# EAGLE board LB_BIT_iX_1IN_1OUT-XLWIDE-v03(1_1x) (EAGLE 6.5.0)
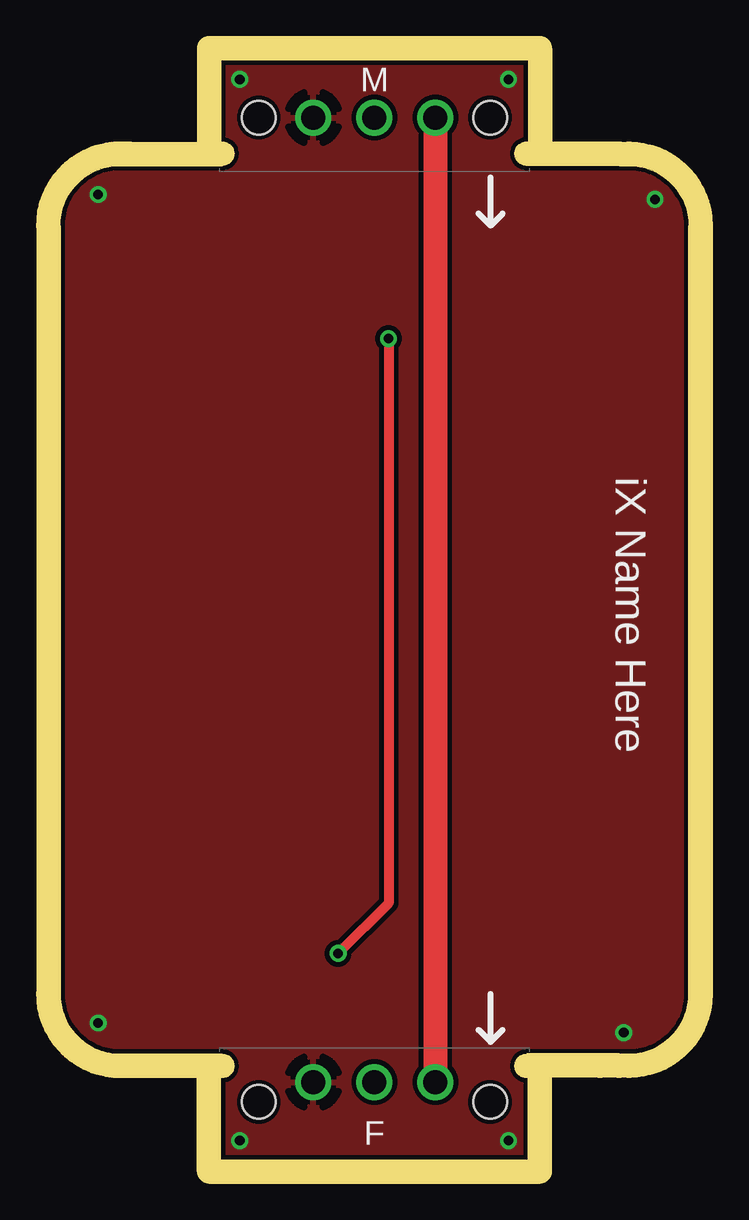
[diagram p0: board, top side]
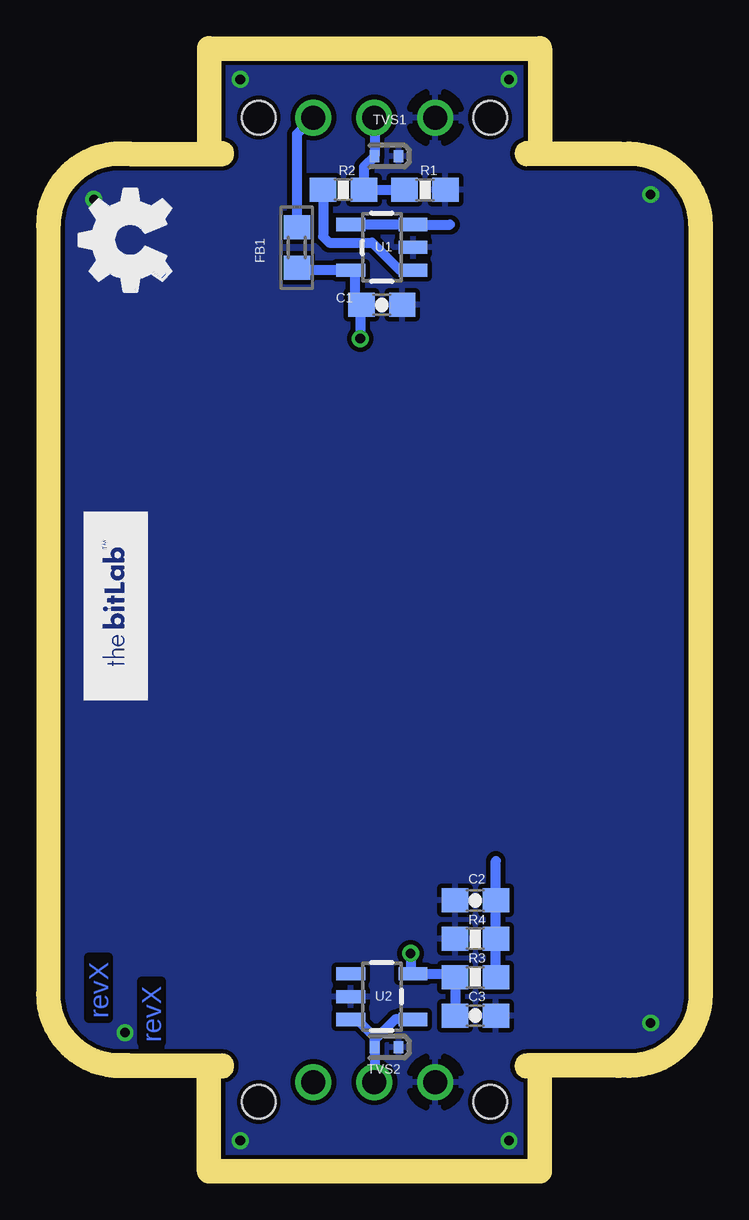
[diagram p1: board, bottom side, seen from below]

Size 26.2 x 45.81 mm. Coordinates in mm from the lower left corner, seen from the top.
Outline: 2.9,4.4 2.5,4.4 arc-90 0,6.9 0,38.91 arc-90 2.5,41.41 2.9,41.41
Outline: 23.3,41.41 23.7,41.41 arc-90 26.2,38.91 26.2,6.9 arc-90 23.7,4.4 23.3,4.4
Copper layers (1*16): Top 0.035mm / dielectric 1.5mm / Bottom 0.035mm
Design rules "default": minimum track width 0.2mm, minimum drill 0.4mm, track to track 0.2mm, track to pad 0.2mm, pad to pad 0.2mm, via to via 0.2mm, smd to smd 0mil, copper to edge 0.2mm, drill to drill 0.2mm, minimum pad ring 0.2mm, minimum via ring 0.15mm, stop-mask expansion 0.1mm, vias tented up to drill 0mil, thermal gap 0.2mm
Milling: 10 lines

## Footprints (pad centres in the part's own frame; a part is rotated, then mirrored left to right if it is on the bottom)
BITSNAP_V03_FEMALE = drill 1: GND 4.065,3.44; SIG 6.605,3.44; VCC 9.145,3.44 | hole 1.4: 1.785,2.61; 11.425,2.61
BITSNAP_V03_MALE = drill 1: GND1 9.145,2.61; SIG1 6.605,2.61; VCC1 4.065,2.61 | hole 1.4: 1.785,2.61; 11.425,2.61
CAP-0603 = smd 1.1 x 1: 1 -0.85,0; 2 0.85,0
R0603 = smd 1 x 1.1: 1 -0.85,0; 2 0.85,0
RES-0603 = smd 1.1 x 1: 1 -0.85,0; 2 0.85,0
SOD-923 = smd 0.4 x 0.5: 1 -0.5,0; 2 0.5,0
SOT23-5 = smd 0.55 x 1.2: 1 -0.95,-1.3; 2 0,-1.3; 3 0.95,-1.3; 4 0.95,1.3; 5 -0.95,1.3

## Placement (x,y rotation side)
BSF1  BITSNAP_V03_FEMALE  [BITSNAP_V03_FEMALE]  6.5,-0.21 0 top
BSM1  BITSNAP_V03_MALE  [BITSNAP_V03_MALE]  19.71,46.02 180 top
C1  0.1uF  [CAP-0603]  12.79,35.61 0 bottom
C2  10uF  [CAP-0603]  8.89,10.8 180 bottom
C3  1.0uF  [CAP-0603]  8.89,6 180 bottom
FB1  FERRITE-BEAD0603  [R0603]  16.33,38 90 bottom
R1  1meg  [RES-0603]  10.99,40.41 180 bottom
R2  10K  [RES-0603]  14.39,40.41 0 bottom
R3  3K3  [RES-0603]  8.89,7.6 180 bottom
R4  3K3  [RES-0603]  8.89,9.2 0 bottom
TVS1  ESD9B5.0ST5G  [SOD-923]  12.59,41.81 180 bottom
TVS2  ESD9B5.0ST5G  [SOD-923]  12.59,4.69 180 bottom
U1  LV321SOT23-5  [SOT23-5]  12.79,38.01 90 bottom
U2  LV321SOT23-5  [SOT23-5]  12.79,6.79 270 bottom
U$1  OSHW-LOGOL  [OSHW-LOGO-L]  -37.62,-68.43 0 top  (outside the outline)
U$2  OSHWCREDIT  [OSHWCREDIT]  -92.35,-64.52 0 top  (outside the outline)
U$3  [OSHW_FILLX150_NOTEXT]  21.59,36.19 90 bottom
U$4  [BITLAB-LOGO]  22.54,26.99 270 top
U$5  FRAME-LETTER-OHWOHW  [FABDWG01-OHW]  -0.11,-0.21 0 top

## Library data of the parts
BSF1 BSM1 = bitSnap
C1-C3 FB1 R1-R4 U1 U2 U$2 U$4 U$5 = LITTLEBITS
TVS1 TVS2 = LITTLEBITS; IEC_ESD_PROT0: +/-18kV; LB_PN: ?; MPN: ESD9B5.0ST5G; V_CLAMP: ?; V_OPERATION: 5V
U$1 = LITTLEBITS131206
U$3 = ohw-logo

## Nets
GND: BSF1.GND BSM1.GND1 C1.2 C2.2 C3.1 R1.1 R4.1 TVS1.1 TVS2.1 U1.2 U2.2
LB_VCC: BSF1.VCC BSM1.VCC1 FB1.2
N$2: U1.3 U1.4
N$3: U2.1
N$4: R2.1 U1.1
SIG_IN: BSM1.SIG1 R1.2 R2.2 TVS1.2
SIG_OUT: BSF1.SIG TVS2.2 U2.3 U2.4
VCC: C1.1 C3.2 FB1.1 R3.2 U1.5 U2.5
VREF: C2.1 R3.1 R4.2

## Tracks (layer width: path | path; a pad name or v marks a point on that pad's centre or on a via)
GND  (via drill 0.4)
  other vias: 7.49,0.79 18.69,0.79 23.49,5.29 24.79,40.01 18.69,45.01 7.49,45.01 1.59,40.21 1.59,5.69
  pour Bottom: -0.39,-0.12 26.62,-0.12 26.62,45.8 -0.39,45.8
  pour Top: -0.39,-0.12 26.62,-0.12 26.62,45.8 -0.39,45.8
LB_VCC
  Top 1: BSM1.VCC1 BSF1.VCC
  Bottom 0.406: BSM1.VCC1 16.33,42.73 FB1.2
N$2
  Bottom 0.406: U1.4 U1.3 9.94,38.96
N$4
  Bottom 0.406: R2.1 15.24,38.46 14.99,38.21 13.19,38.21 12.04,37.06 U1.1
SIG_IN
  Bottom 0.406: R1.2 R2.2 13.54,41.36 TVS1.2 BSM1.SIG1
SIG_OUT
  Bottom 0.406: U2.4 12.24,5.84 13.09,4.99 TVS2.2 | U2.3 13.84,5.84 13.09,5.09 TVS2.2 | TVS2.2 BSF1.SIG
VCC  (via drill 0.4)
  Top 0.406: v13.69,34.2 13.69,10.69 v11.59,8.59
  Bottom 0.406: U1.5 16.33,37.06 FB1.1 | R3.2 | U1.5 14.04,37.01 | 9.84,5.8 C3.2 R3.2 | U1.5 13.89,37.06 13.89,35.61 C1.1 13.69,35.61 v13.69,34.2 | R3.2 9.74,7.74 U2.5 11.59,7.84 v11.59,8.59
VREF
  Bottom 0.406: R3.1 R4.2 C2.1 8.04,12.45

## Text on the board
Bottom: revX | revX
tPlace: iX Name Here